# Altium PCB CurrentMeter.PcbDoc
Units mm, origin at the board's own origin, x right, y up, seen from the top; angles counter-clockwise.
Board outline 72.25 x 57.25 mm, 2 copper layers (Top Layer, Bottom Layer); 55 components, 44 nets, 208 pads, 23 vias.
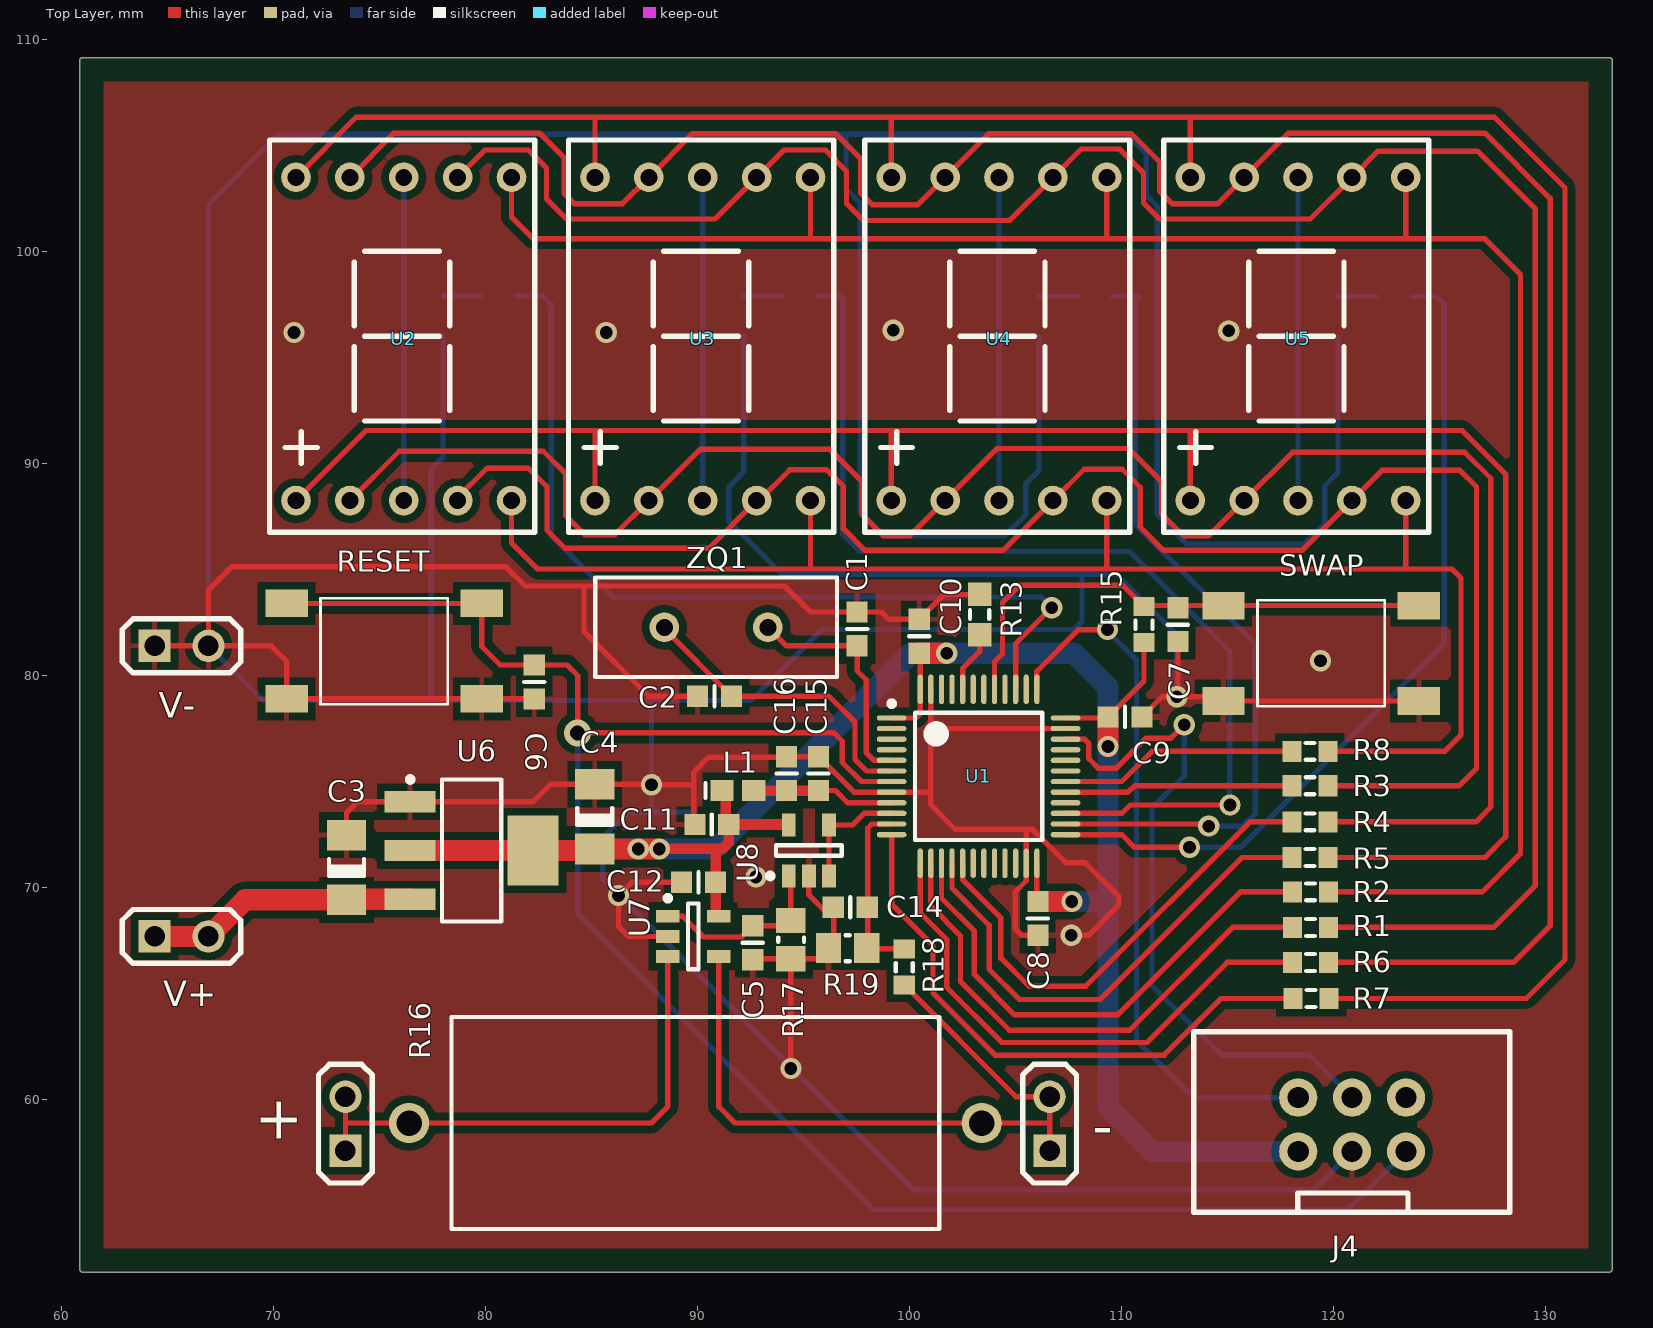
[diagram p0: Top Layer view]
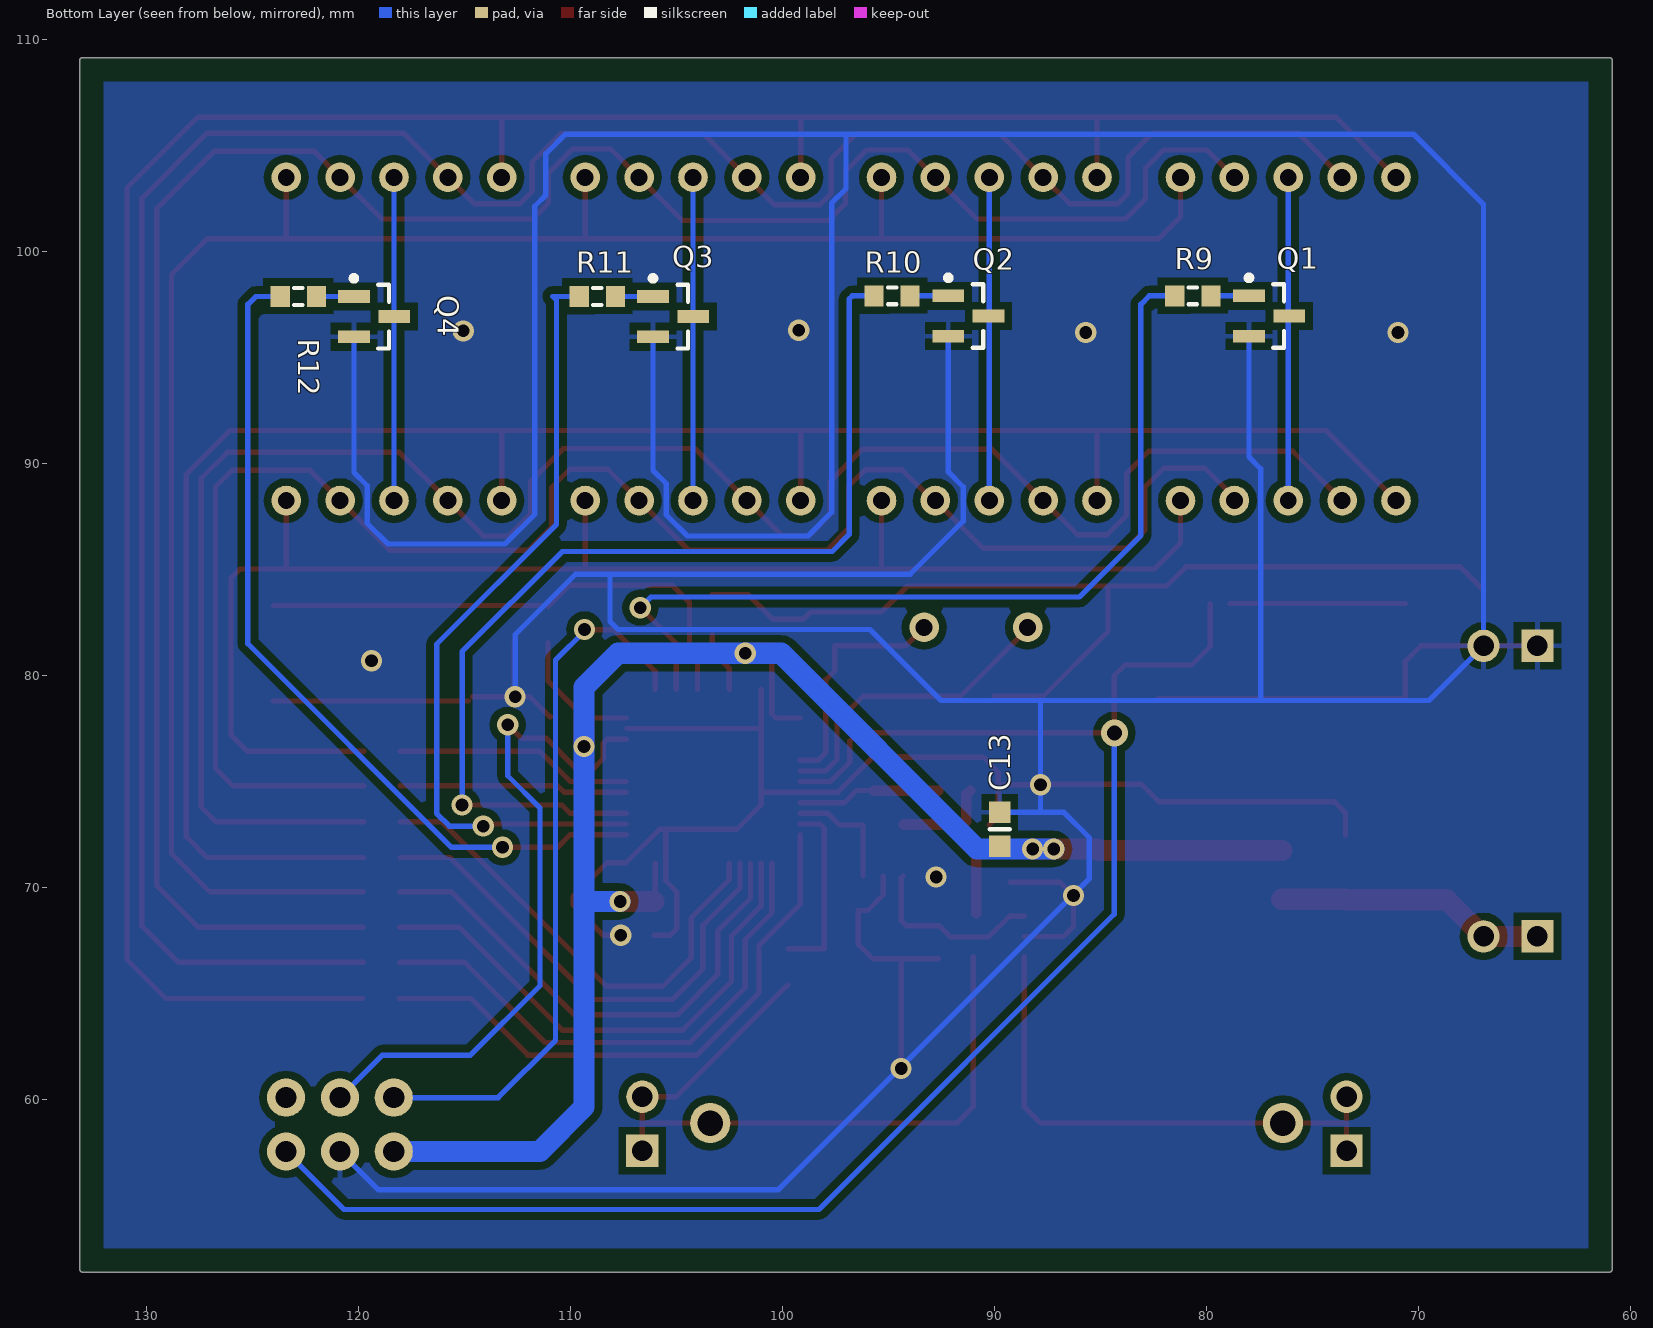
[diagram p1: Bottom Layer view, seen from below]
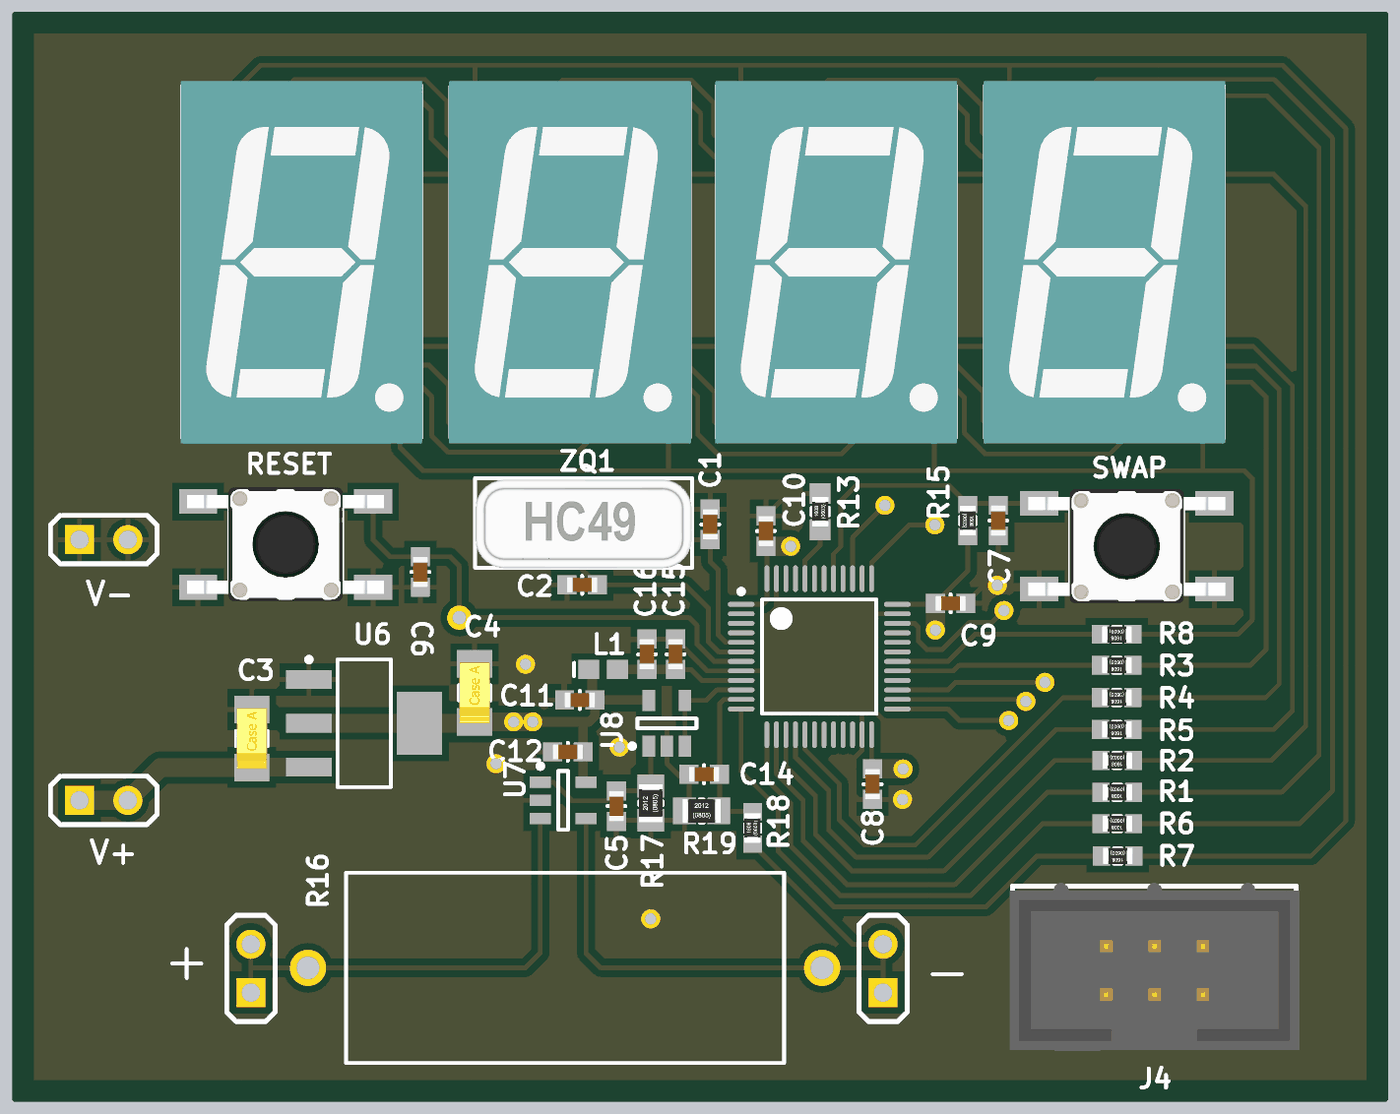
[diagram p2: 3D render of the assembled board from above, using the file's embedded part models]
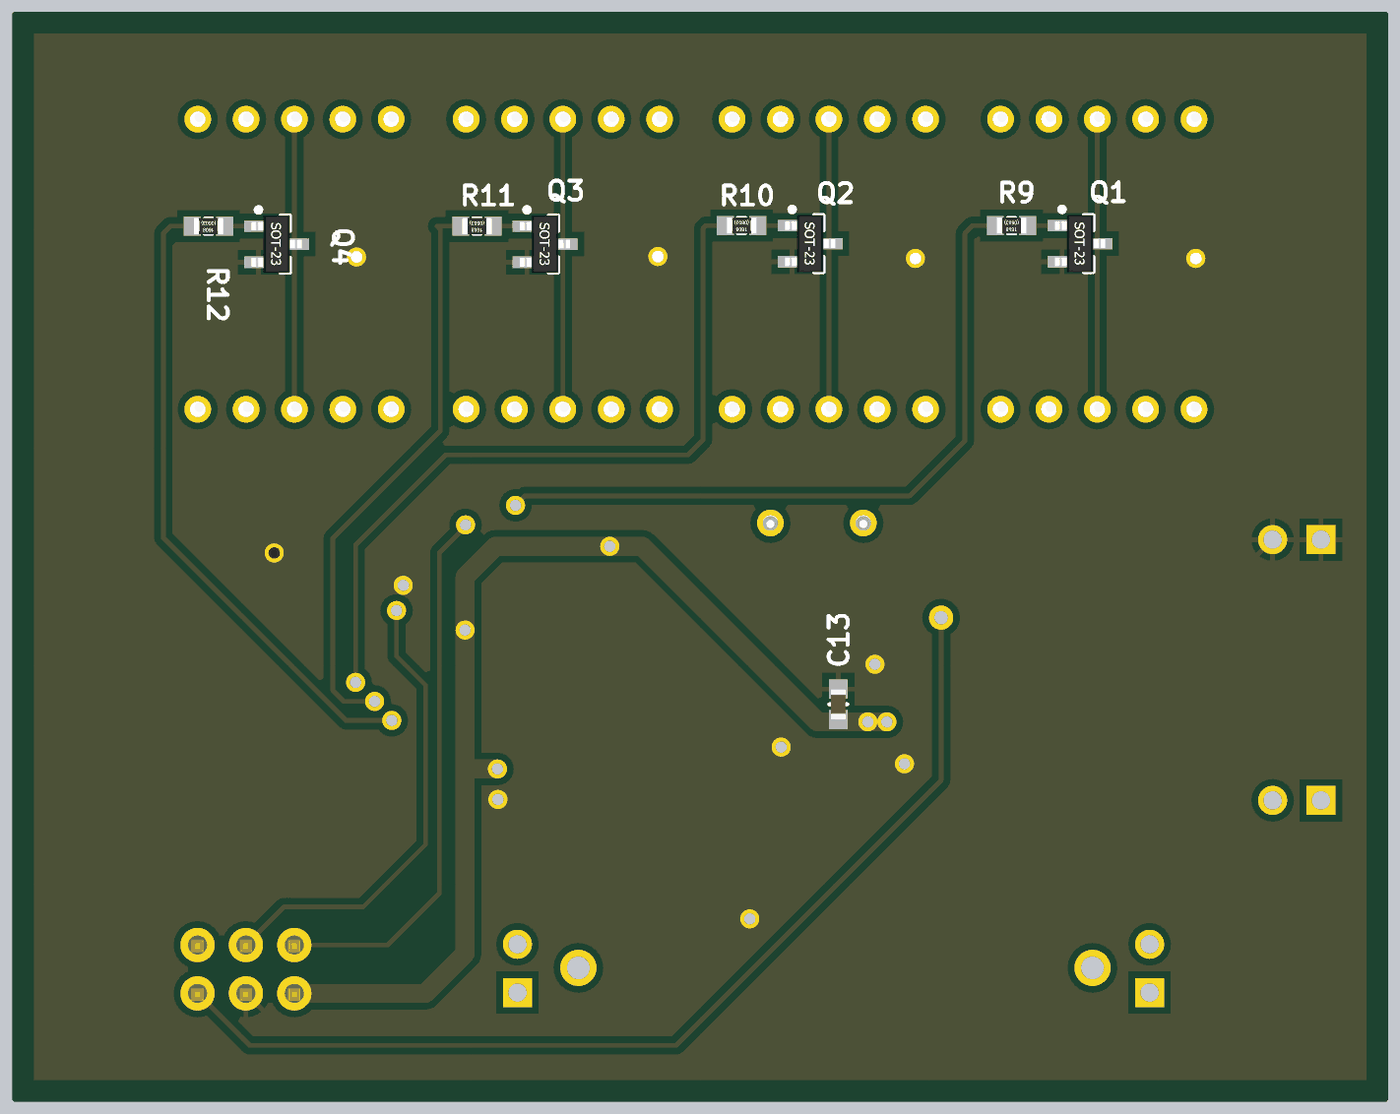
[diagram p3: 3D render of the assembled board from below, using the file's embedded part models]

## Layer stack, top to bottom
Top Solder: solder mask 0.0102, Solder Resist, Dk 3.5
Top Layer: signal copper 0.0356
Dielectric 1: dielectric 0.32, FR-4, Dk 4.8
Bottom Layer: signal copper 0.0356
Bottom Solder: solder mask 0.0102, Solder Resist, Dk 3.5

## Board outline
60.873,52 ccw(c61,52) 61,51.873 133,51.873 ccw(c133,52) 133.127,52 133.127,109 ccw(c133,109) 133,109.127 61,109.127 ccw(c61,109) 60.873,109

## Design rules (kind name [scope] priority, off if disabled: settings)
AssemblyTestPointUsage [All] p1 off:
AssemblyTestpoint [All] p1 off: testpointundercomponent=TRUE minsize=1.016 maxsize=2.54 preferedsize=1.524 minholesize=0 maxholesize=1.016 preferedholesize=0.813 testpointgrid=0.025 usegrid=TRUE gridtolerance=0 allowsidetop=TRUE allowsidebottom=TRUE
Clearance UnplatedPads_Clearance [IsPad and OnLayer('Multi-Layer') and not PadIsPlated] p1: gap=3
Clearance Poly_Clearance [InPolygon] p2: gap=0.35
Clearance Class4_ExtLayers_Clearance [All] p3: gap=0.15
Clearance Class4_IntLayers_Clearance [OnCopper and not (OnLayer('Top Layer') or OnLayer('Bottom Layer'))] p4: gap=0.15
DiffPairsRouting [All] p1: maxlimit=0.15 minlimit=0.15 mostfreqgap=0.15 toplayer_minwidth=0.25 toplayer_maxwidth=0.25 toplayer_prefwidth=0.25 bottomlayer_minwidth=0.25 bottomlayer_maxwidth=0.25 bottomlayer_prefwidth=0.25 maxuncoupledlength=10
FabricationTestPointUsage [All] p1 off: valid=0 allowmultiple=FALSE
FabricationTestpoint [All] p1 off: side=3 testpointundercomponent=TRUE minsize=1.016 maxsize=2.54 preferedsize=1.524 minholesize=0 maxholesize=1.016 preferedholesize=0.813 testpointgrid=0.025 allowsidetop=TRUE allowsidebottom=TRUE usegrid=TRUE gridtolerance=0
HoleSize HoleSize_UnplatedPads [IsPad and not PadIsPlated] p1: absolutevalues=TRUE maxlimit=999 minlimit=0.5 maxpercent=80.000 minpercent=20.000
HoleSize HoleSize_PlatedPads [IsPad and PadIsPlated] p2: absolutevalues=TRUE maxlimit=999 minlimit=0.3 maxpercent=80.000 minpercent=20.000
MinimumAnnularRing MinimumAnnularRing_Pad [IsPad and PadIsPlated] p1: minimumring=0.25
MinimumAnnularRing MinimumAnnularRing_Via [IsVia] p2: minimumring=0.15
MinimumSolderMaskSliver [All] p1: minsoldermaskwidth=0.15
NetAntennae [All] p1 off: netantennaetolerance=0
PlaneClearance [All] p1: clearance=0.35
PlaneConnect [All] p1: planeconnectstyle=Relief reliefexpansion=0.5 reliefentries=4 reliefconductorwidth=0.25 reliefairgap=0.35
PlaneConnect PlaneConnect_Via_Thermal [IsVia or InPadClass('ThermalPads')] p2: planeconnectstyle=Direct reliefexpansion=0.508 reliefentries=4 reliefconductorwidth=0.254 reliefairgap=0.254
PolygonConnect PolygonConnect_Via [IsVia] p1: connectstyle=Direct reliefconductorwidth=0.254 reliefentries=4 polygonreliefangle="90 Angle" airgapwidth=0.254
PolygonConnect [All] p2: connectstyle=Relief reliefconductorwidth=0.25 reliefentries=4 polygonreliefangle="90 Angle" airgapwidth=0.35
RoutingVias RADIO_RoutingVias [HasFootprint('ANTENNA')] p1: holewidth=0.2 width=1.2 viastyle="Through Hole" minholewidth=0 minwidth=0.5 maxholewidth=1 maxwidth=2
RoutingVias Thermal_RoutingVias [IsVia and InAnyComponent] p2: holewidth=0.2 width=0.5 viastyle="Through Hole" minholewidth=0.2 minwidth=0.5 maxholewidth=0.2 maxwidth=0.5
RoutingVias PWR_RoutingVias [InNetClass('PWR')] p3: holewidth=0.5 width=1 viastyle="Through Hole" minholewidth=0.3 minwidth=0.8 maxholewidth=0.5 maxwidth=1
RoutingVias [All] p4: holewidth=0.3 width=0.8 viastyle="Through Hole" minholewidth=0.3 minwidth=0.8 maxholewidth=2 maxwidth=2
ShortCircuit ShortCircuit_RADIO [HasFootprint('ANTENNA')] p1: allowed=TRUE
ShortCircuit [All] p2: allowed=FALSE
SilkToBoardRegionClearance [All] p1 off:
SilkToSilkClearance [All] p1: silktosilkclearance=0.15
SilkToSolderMaskClearance [IsPad vs IsText] p1: minsilkscreentomaskgap=0.05 clearancetoexposedcopper=TRUE
SolderMaskExpansion SolderMaskExpansion_Vias [IsVia] p1: expansion=-10
SolderMaskExpansion SolderMaskExpansion_Pads [IsPad] p2: expansion=0.05
Width PWR_Width [InNetClass('PWR')] p1: maxlimit=10 minlimit=0.25 preferedwidth=0.508
Width Class4_Width_ExtLayers [OnTopLayer or onBottomlayer] p2: maxlimit=10 minlimit=0.15 preferedwidth=0.15
Width Class4_Width_IntLayers [OnCopper and not (OnTopLayer or onBottomLayer)] p3: maxlimit=10 minlimit=0.15 preferedwidth=0.15
15 further rules are at their usual default settings.

## Components (designator, comment, footprint, x,y, rotation, side; value= is the part's Value field where it differs from the comment)
+ "PLS-2-2.54" PLS-2-2.54 73.4,57.6 r180 top (schematic designator J1)
- "PLS-2-2.54" PLS-2-2.54 106.6,57.6 r180 top (schematic designator J2)
C1 "CAPC_0603" CAPC1608-0603N#1 97.525,82.2 r90 top
C2 "CAPC_0603" CAPC1608-0603N#1 90.8,79.025 r180 top
C3 "TCAPC_A" TCAPC_A 73.45,70.95 r90 top
C4 "TCAPC_A" TCAPC_A 85.15,73.35 r90 top
C5 "CAPC_0603" CAPC1608-0603N#2 92.6,67.4 r90 top
C6 "CAPC_0603" CAPC1608-0603N#2 82.3,79.7 r90 top
C7 "CAPC_0603" CAPC1608-0603N#2 112.65,82.4 r90 top
C8 "CAPC_0603" CAPC1608-0603N#2 106.05,68.55 r90 top
C9 "CAPC_0603" CAPC1608-0603N#2 110.15,78.05 r180 top
C10 "CAPC_0603" CAPC1608-0603N#2 100.45,81.85 r270 top
C11 "CAPC_0603" CAPC1608-0603N#2 90.675,72.975 r0 top
C12 "CAPC_0603" CAPC1608-0603N#2 90.05,70.25 r0 top
C13 "CAPC_0603" CAPC1608-0603N#2 89.75,72.75 r270 bottom
C14 "CAPC_0603" CAPC1608-0603N#1 97.2,69.075 r180 top
C15 "CAPC_0603" CAPC1608-0603N#2 95.7,75.375 r270 top
C16 "CAPC_0603" CAPC1608-0603N#2 94.2,75.375 r270 top
J4 "IDC6-2.54" IDC6-2.54 123.4,60.1 r0 top
L1 "INDC-0603" INDC1608AN 91.9,74.575 r0 top
Q1 "BC817" SOT23-3N 77.05,96.95 r180 bottom
Q2 "BC817" SOT23-3N 91.225,96.95 r180 bottom
Q3 "BC817" SOT23-3N 105.15,96.925 r180 bottom
Q4 "BC817" SOT23-3N 119.25,96.925 r180 bottom
R1 "RESC_0603" RESC1608-0603N#1 118.9,68.125 r180 top
R2 "RESC_0603" RESC1608-0603N#1 118.9,69.8 r180 top
R3 "RESC_0603" RESC1608-0603N#1 118.875,74.8 r180 top
R4 "RESC_0603" RESC1608-0603N#1 118.875,73.1 r180 top
R5 "RESC_0603" RESC1608-0603N#1 118.875,71.425 r180 top
R6 "RESC_0603" RESC1608-0603N#1 118.9,66.475 r180 top
R7 "RESC_0603" RESC1608-0603N#1 118.925,64.775 r180 top
R8 "RESC_0603" RESC1608-0603N#1 118.875,76.425 r180 top
R9 "RESC_0603" RESC1608-0603N#1 80.65,97.9 r0 bottom
R10 "RESC_0603" RESC1608-0603N#1 94.825,97.9 r0 bottom
R11 "RESC_0603" RESC1608-0603N#1 108.725,97.875 r0 bottom
R12 "RESC_0603" RESC1608-0603N#1 122.825,97.875 r0 bottom
R13 "RESC_0603" RESC1608-0603M 103.3,82.875 r270 top
R15 "RESC_0603" RESC1608-0603N#1 111.05,82.4 r270 top
R16 "RES_5W" RES5W 103.4,58.9 r180 top
R17 "RESC_0805" RESC2012-0805N#1 94.4,67.55 r90 top
R18 "RESC_0603" RESC1608-0603N#2 99.75,66.25 r270 top
R19 "RESC_0805" RESC2012-0805N#2 97.075,67.15 r180 top
RESET "SWT-34" SWT-34 75.225,81.15 r0 top (schematic designator B1)
SWAP "SWT-34" SWT-34 119.4,81.05 r0 top (schematic designator B2)
U1 "STM32F103C8T6" QFP48_L 103.25,75.25 r0 top
U2 "BL-S56A-12" BL-S56A-12 71.068,88.249 r0 top
U3 "BL-S56A-12" BL-S56A-12 85.165,88.249 r0 top
U4 "BL-S56A-12" BL-S56A-12 99.135,88.249 r0 top
U5 "BL-S56A-12" BL-S56A-12 113.232,88.249 r0 top
U6 "LM1117MP-3.3" MP04A_N 79.35,71.75 r0 top
U7 "INA169" INA169_N 89.8,67.7 r0 top
U8 "LM321MF" MF05A_N 95.25,71.75 r90 top
V+ "PLS-2-2.54" PLS-2-2.54 64.4,67.7 r90 top (schematic designator J3)
V- "PLS-2-2.54" PLS-2-2.54 64.4,81.4 r90 top (schematic designator J5)
ZQ1 "Quartz HC49S" HC-49S 90.875,82.275 r0 top

## Footprints (in the part's own frame and the unit in brackets; to place one, negate y for a bottom-side part, rotate by r counter-clockwise, add the part's x,y. Pads: shape width x height; smd on the part's side, far side on the other; paste and mask are expansions set on the pad)
BL-S56A-12 [mm] "LED Numeric Display, 1 Digit"
  round 1.4 hole 0.8: 1(0,0) 2(2.54,0) 3(5.08,0) 4(7.62,0) 5(10.16,0) 6(10.16,15.24) 7(7.62,15.24) 8(5.08,15.24) 9(2.54,15.24) 10(0,15.24)
  silkscreen extent -1.25,-1.5 11.25,17, body extent -1.35,-1.8 11.35,17.25, height 8.03
CAPC1608-0603N#1 [mm] "Chip Capacitor, Body 1.6x0.8mm, IPC Medium Density"
  rect 1x1 smd: 1(0.8,0) 2(-0.8,0)
  silkscreen extent 0,-0.48 0,0.48, body extent -0.8,-0.4 0.8,0.4, height 0.6
CAPC1608-0603N#2 [mm] "Chip Capacitor, Body 1.6x0.8mm, IPC Medium Density"
  rect 1x1 smd: 1(-0.8,0) 2(0.8,0)
  silkscreen extent 0,-0.48 0,0.48, body extent -0.8,-0.4 0.8,0.4, height 0.6
HC-49S [mm] "Quartz Crystal, Thru-Hole; 2 Leads; Body 11.35 x 4.65 x 13.46 mm (LxWxH max)"
  round 1.4 hole 0.8: 1(-2.44,0) 2(2.44,0)
  silkscreen extent -5.7,-2.35 5.7,2.35, body extent -5.67,-2.37 5.68,2.28, height 3.6
IDC6-2.54 [mm]
  round 1.8 hole 1: 1(-5.08,-2.54) 2(-5.08,0) 3(-2.54,-2.54) 4(-2.54,0) 5(0,-2.54) 6(0,0)
  silkscreen extent -10,-5.4 4.9,3.1, body extent -10.15,-5.58 5.07,3.27, height 9.13
INA169_N [mm] "SOT23, 5-Leads, Body 2.90x2.80mm, Pitch 0.95mm, IPC Medium Density"
  rect 1.1x0.6 smd: 1(-1.2,0.95) 2(-1.2,0) 3(-1.2,-0.95) 4(1.2,-0.95) 5(1.2,0.95)
  silkscreen extent -1.32,-1.55 0.25,1.92, body extent -0.87,-1.52 0.87,1.53, height 1.45
INDC1608AN [mm] "Chip Inductor, Body 1.6x0.8mm, IPC Medium Density"
  rect 1.1x1 smd: 1(-0.75,0) 2(0.75,0)
  silkscreen extent -1.53,-0.35 -1.53,0.35, body extent -0.9,-0.5 0.9,0.5, height 1
MF05A_N [mm] "SOT23, 5-Leads, Body 2.9x1.6mm, Pitch 0.95mm, Lead Span 2.8mm, IPC Medium Density"
  rect 1.1x0.65 smd: 1(-1.2,0.95) 2(-1.2,0) 3(-1.2,-0.95) 4(1.2,-0.95) 5(1.2,0.95)
  silkscreen extent -1.32,-1.55 0.25,1.95, body extent -0.9,-1.55 0.9,1.55, height 1.22
MP04A_N [mm] "SOT223, 4-Leads, Body 6.5x3.5mm, Pitch 2.3mm, Lead Span 7mm, IPC Medium Density"
  rect 2.4x1 smd: 1(-2.9,2.3) 2(-2.9,0) 3(-2.9,-2.3)
  rect 2.4x3.3 smd: 4(2.9,0)
  silkscreen extent -3.02,-3.35 1.4,3.47, body extent -1.85,-3.35 1.85,3.35, height 1.8
PLS-2-2.54 [mil] "Classic 100 mil header plastic case"
  rect 60x60 hole 38: 1(0,0)
  round 60 hole 38: 2(0,-100)
  silkscreen extent -50,-160 50,60, body extent -50,-160 50,60, height 300
QFP48_L [mm] "TSQFP, 48-Leads, Body 7.00x7.00mm, Pitch 0.50mm, IPC High Density"
  oval 1.4x0.25 smd: 1(-4.1,2.75) 2(-4.1,2.25) 3(-4.1,1.75) 4(-4.1,1.25) 5(-4.1,0.75) 6(-4.1,0.25) 7(-4.1,-0.25) 8(-4.1,-0.75) 9(-4.1,-1.25) 10(-4.1,-1.75) 11(-4.1,-2.25) 12(-4.1,-2.75) 25(4.1,-2.75) 26(4.1,-2.25) 27(4.1,-1.75) 28(4.1,-1.25) 29(4.1,-0.75) 30(4.1,-0.25) 31(4.1,0.25) 32(4.1,0.75) 33(4.1,1.25) 34(4.1,1.75) 35(4.1,2.25) 36(4.1,2.75)
  oval 0.25x1.4 smd: 13(-2.75,-4.1) 14(-2.25,-4.1) 15(-1.75,-4.1) 16(-1.25,-4.1) 17(-0.75,-4.1) 18(-0.25,-4.1) 19(0.25,-4.1) 20(0.75,-4.1) 21(1.25,-4.1) 22(1.75,-4.1) 23(2.25,-4.1) 24(2.75,-4.1) 37(2.75,4.1) 38(2.25,4.1) 39(1.75,4.1) 40(1.25,4.1) 41(0.75,4.1) 42(0.25,4.1) 43(-0.25,4.1) 44(-0.75,4.1) 45(-1.25,4.1) 46(-1.75,4.1) 47(-2.25,4.1) 48(-2.75,4.1)
  silkscreen extent -4.22,-3 3,3.55, body extent -3.5,-3.5 3.5,3.5, height 1.6
RES5W [mm] "5W resistor"
  round 1.9 hole 1.2: 1(0,0) 2(27,0)
  silkscreen extent 2,-5 25,5, body extent -0.25,-5 27.25,5, height 10
RESC1608-0603M [mm] "Chip Resistor, Body 1.6x0.8mm, IPC Low Density"
  rect 1.1x1.1 smd: 1(0.95,0) 2(-0.95,0)
  silkscreen extent -0.2,-0.45 0.2,0.45, body extent -0.78,-0.43 0.77,0.42, height 0.45
RESC1608-0603N#1 [mm] "Chip Resistor, Body 1.6x0.8mm, IPC Medium Density"
  rect 0.9x1 smd: 1(-0.85,0) 2(0.85,0)
  silkscreen extent -0.2,-0.4 0.2,0.4, body extent -0.77,-0.42 0.78,0.43, height 0.45
RESC1608-0603N#2 [mm] "Chip Resistor, Body 1.6x0.8mm, IPC Medium Density"
  rect 0.9x1 smd: 1(0.85,0) 2(-0.85,0)
  silkscreen extent -0.2,-0.4 0.2,0.4, body extent -0.78,-0.43 0.77,0.42, height 0.45
RESC2012-0805N#1 [mm] "Chip Resistor, Body 2.0x1.3mm, IPC Medium Density"
  rect 1.2x1.4 smd: 1(-0.9,0) 2(0.9,0)
  silkscreen extent -0.1,-0.63 0.1,0.6, body extent -1,-0.62 1,0.63, height 0.45
RESC2012-0805N#2 [mm] "Chip Resistor, Body 2.0x1.3mm, IPC Medium Density"
  rect 1.2x1.4 smd: 1(0.9,0) 2(-0.9,0)
  silkscreen extent -0.1,-0.6 0.1,0.63, body extent -1,-0.63 1,0.62, height 0.45
SOT23-3N [mm] "SOT23, 3-Leads, Body 2.9x1.3mm, Pitch 0.95mm, Lead Span 2.5mm, IPC Medium Density"
  rect 1.5x0.6 smd: 1(-0.95,0.95) 2(-0.95,-0.95) 3(0.95,0)
  silkscreen extent -1.07,-1.5 0.7,1.92, body extent -1.32,-1.5 1.32,1.5, height 1.08
SWT-34 [mm] "SMD Button, KLS7-TS6604-7.0-180-T"
  rect 2x1.3 smd: 1(-4.6,-2.25) 2(4.6,-2.25) 3(-4.6,2.25) 4(4.6,2.25)
  silkscreen extent -3,-2.5 3,2.5, body extent -5.18,-3 5.18,3, height 7
TCAPC_A [mm] "Tantalum type A capacitor"
  rect 1.45x1.85 smd: 1(-1.525,0) 2(1.525,0)
  silkscreen extent -0.4,-0.82 0.4,0.83, body extent -1.6,-0.8 1.6,0.8, height 1.6

## Part data
C1 C2 C5 C6 C7 C8 C9 C10 C11 C12 C13 C14 C15 C16: "Capacitor 0603"
C3 C4: "Capacitor tantalum SMD type A"
J4: "IDC6 2.54 mm pitch Straight, plastic Box"
L1: "Chip Inductor, Body Body 1.6x0.8mm"
Q1 Q2 Q3 Q4: "BC817 NPN Transistor"
R1 R2 R3 R4 R5 R6 R7 R8 R9 R10 R11 R12 R13 R15 R18: "Resistor 0603"
R16: "Resistor 5W"
R17 R19: "Resistor 0805"
RESET SWAP: "KLS7-TS6604-7.0-180-T, SMD Button h=7mm"
U1: "ARM 32-bit MCU with Flash, USB, CAN, seven 16-bit timers, two ADCs and nine communication interfaces"
U2 U3 U4 U5: "LED Numeric Display, 1 Digit"
U6: "800mA Low-Dropout Linear Regulator"
U7: "High-side Current Shunt Monitor"
U8: "Low Power Single Op Amp"

## Via types
v1: diameter 1, hole 0.6, Top Layer to Bottom Layer, 22 vias
v2: diameter 1.27, hole 0.711, Top Layer to Bottom Layer, 1 vias

## Nets (pads, with @x,y where several pads share a name; then routed paths per layer and width w, separated by ;. In a path a pad name is that pad's centre, name@x,y a point inside that pad or via, vN(x,y) a via of type N, cw(c..) or ccw(c..) an arc to the next point about the centre after c; other vN are vias at no path point)
3V3: C4.1 C8.2 C9.2 C10.2 C11.2 C12.2 C13.2 J4.1 L1.1 R15.2 U1.1 U1.24 U1.36 U1.48 U6.2 U6.4 U7.5 U8.5 | length 98
  Top Layer w0.25: U1.1 100.3,78 100.5,78.2 U1.48 100.5,81 C10.2 ; U1.24 106,69.4 C8.2 ; U1.36 C9.2@109.3,78 ; C9.2 111.05,79.75 R15.2
  Top Layer w0.5: v1(88.2,71.825) 91.175,71.825 91.475,72.125 C11.2 ; U7.5@90.85,68.8 C12.2 90.85,71.775 ; L1.1 91.325,74.4 91.325,73.125 C11.2 ; U8.5@94.275,72.975 C11.2
  Top Layer w1: U6.2 U6.4 85.075,71.75 C4.1 v1(87.2,71.825) v1(88.2,71.825) ; C10.2@100.5,81.05 v1(101.75,81.05) ; C8.2 v1(107.65,69.35) ; v1(109.35,76.65) C9.2
  Bottom Layer w1: v1(87.2,71.825) v1(88.2,71.825) 90.825,71.825 100.05,81.05 v1(101.75,81.05) 107.75,81.05 109.35,79.45 v1(109.35,76.65) 109.35,59.65 111.44,57.56 J4.1 ; v1(107.65,69.35) 109.3,69.35
7LED_SWAP: C7.2 R15.1 SWAP.3 SWAP.4 U1.41 | length 24.6
  Top Layer w0.25: U1.41 104,80.65 104.375,81.025 104.375,83.45 105.175,84.25 110.05,84.25 R15.1 ; R15.1@111.1,83.3 SWAP.3 SWAP.4
15V: C3.1 U6.3 V+.1 V+.2 | length 12.8
  Top Layer w0.5: U6.3@76.425,69.425 U6.3
  Top Layer w1: V+.1 V+.2 68.665,69.425 C3.1 73.475,69.45 U6.3
A: R1.2 U1.14 | length 24.8
  Top Layer w0.25: U1.14 101,69.125 102.4,67.725 102.4,65.575 104.7,63.275 110.375,63.275 115.225,68.125 R1.2
B: R2.2 U1.15 | length 24.1
  Top Layer w0.25: U1.15 101.5,69.5 103.05,67.95 103.05,65.9 104.95,64 109.8,64 115.6,69.8 R2.2
C: R3.2 U1.29 | length 10.8
  Top Layer w0.25: U1.29 110.3,74.5 110.6,74.8 R3.2
CATH1: R9.2 U1.39 | length 42.2
  Top Layer w0.25: U1.39 105,81.5 v1(106.7,83.2)
  Bottom Layer w0.25: R9.2 82.7,97.9 83.1,97.5 83.1,86.6 86,83.7 106.2,83.7 v1(106.7,83.2)
CATH2: R10.2 U1.27 | length 48
  Top Layer w0.25: U1.27 110,73.5 110.4,73.9 v1(115.1,73.9)
  Bottom Layer w0.25: R10.2 96.7,97.9 96.85,97.75 96.85,86.65 97.65,85.85 110.375,85.85 115.1,81.125 v1(115.1,73.9)
CATH3: R11.2 U1.26 | length 37.3
  Top Layer w0.25: U1.26 114,73 v1(114.1,72.9)
  Bottom Layer w0.25: R11.2 110.825,97.875 110.65,97.7 110.65,87.125 116.3,81.475 116.3,73.5 115.7,72.9 v1(114.1,72.9)
CATH4: R12.2 U1.25 | length 39.8
  Top Layer w0.25: U1.25 110,72.5 110.6,71.9 v1(113.2,71.9)
  Bottom Layer w0.25: v1(113.2,71.9) 115.6,71.9 125.2,81.5 125.2,97.5 124.825,97.875 R12.2
D: R4.2 U1.17 | length 22.7
  Top Layer w0.25: U1.17 102.5,70.375 104.3,68.575 104.3,66.675 105.625,65.35 108.3,65.35 116.05,73.1 R4.2
DP: R8.2 U1.30 | length 11.3
  Top Layer w0.25: U1.30 110,75 111.425,76.425 R8.2
E: R5.2 U1.16 | length 23.4
  Top Layer w0.25: U1.16 102,69.975 103.75,68.225 103.75,66.15 105.175,64.725 108.975,64.725 115.675,71.425 R5.2
F: R6.2 U1.13 | length 25.3
  Top Layer w0.25: U1.13 100.5,68.8 101.75,67.55 101.75,65.3 104.35,62.7 111.2,62.7 114.975,66.475 R6.2
G: R7.2 U1.12 | length 27.6
  Top Layer w0.25: U1.12 99.15,69.225 101.1,67.275 101.1,65.025 104.025,62.1 112,62.1 114.675,64.775 R7.2
GND: C1.1 C2.1 C3.2 C4.2 C5.1 C6.1 C7.1 C8.1 C9.1 C10.1 C11.1 C12.1 C13.1 C14.1 C15.1 C16.1 J4.3 Q1.2 Q2.2 Q3.2 Q4.2 R13.2 R17.1 R19.1 RESET.1 RESET.2 SWAP.1 SWAP.2 U1.8 U1.23 U1.35 U1.47 U6.1 U7.2 U8.2 V-.1 V-.2 | length 461.2
  Top Layer w0.25: V-.1 V-.2 ; C3.2 73.45,73.525 73.975,74.05 U6.1 82.25,74.05 83.075,74.875 C4.2 v1@87.825,74.875 ; C6.1 RESET.2 RESET.1 70.625,80.675 69.9,81.4 V-.2 ; v1(87.825,74.85) 89.825,74.85 ; U7.2 86.75,67.7 86.275,68.175 v1(86.275,69.625) 86.9,70.25 C12.1 ; C2.1@90.025,79.025 87.7,79.025 84.65,82.075 84.65,84.225 ; C11.1@90.25,72.95 89.825,73.375 89.825,75.45 90.525,76.15 C16.1@94.6,76.15 ; C5.1@92.65,66.65 R17.1 ; C16.1 C15.1 97.375,74.5 U1.8 100.975,74.5 ; v1(94.4,61.475) R17.1 ; U8.2 95.25,69.65 95.975,68.925 96.425,68.925 96.425,67.325 96.225,67.125 95.75,66.65 R17.1 ; U1.47 101,77.55 ; R13.2 101.625,83.825 C10.1 99.025,82.65 98.675,83 C1.1 95.325,83 94.1,84.225 84.65,84.225 ; C8.1 105.3,67.75 104.975,68.075 104.975,69.8 105.5,70.325 U1.23 105.5,72.75 ; U1.35 101.05,77.5 101,77.55 ; v1(107.625,67.75) 108.425,67.75 109.875,69.2 109.875,69.575 108.275,71.175 107.375,71.175 105.8,72.75 105.5,72.75 ; C9.1 111.9,79 v1(112.6,79) ; C7.1 112.65,79.05 v1(112.6,79) ; SWAP.1@114.6,79 v1(112.6,79) ; SWAP.1 SWAP.2 ; V-.2 66.94,84.04 68.025,85.125 80.975,85.125 81.875,84.225 84.65,84.225 ; 101,77.55 101,73.9 102.15,72.75 105.5,72.75
  Bottom Layer w0.25: Q1.2 78,90.3 77.45,89.75 77.45,78.825 ; C13.1 87.825,73.55 ; Q2.2 92.175,89.6 91.475,88.9 91.475,87.275 93.975,84.775 108.125,84.775 ; Q3.2 106.1,89.675 105.475,89.05 105.475,87.575 104.475,86.575 98.8,86.575 97.675,87.7 97.675,102.275 97,102.95 97,105.525 ; v1(112.6,79) 112.6,81.925 109.75,84.775 108.125,84.775 ; Q4.2 120.2,89.575 119.575,88.95 119.575,87.175 118.6,86.2 113.075,86.2 111.675,87.6 111.675,102.125 111.15,102.65 111.15,104.6 110.225,105.525 97,105.525 ; J4.3 119.05,55.75 100.2,55.75 85.525,70.425 85.525,72.35 86.725,73.55 87.825,73.55 ; 77.45,78.825 69.515,78.825 V-.2 66.94,102.215 70.25,105.525 97,105.525 ; 77.45,78.825 87.825,78.825 ; 87.825,73.55 v1(87.825,74.85) 87.825,78.825 ; 87.825,78.825 92.525,78.825 95.875,82.175 107.75,82.175 108.125,82.55 108.125,84.775
  other v1: 92.75,70.5 119.375,80.7 70.975,96.175 85.7,96.175 115.05,96.25 99.225,96.275
IMEAS: U1.10 U8.3 U8.4 | length 5.6
  Top Layer w0.25: U8.3 U8.4 97.3,72.95 97.85,73.5 U1.10
NetC1_2: C1.2 U1.5 ZQ1.2 | length 11.1
  Top Layer w0.25: ZQ1.2 94.19,81.4 C1.2 97.525,80.225 97.95,79.8 97.95,76.375 98.325,76 U1.5
NetC2_2: C2.2 U1.6 ZQ1.1 | length 14.6
  Top Layer w0.25: ZQ1.1 88.435,82.19 C2.2 96.2,79.025 97.425,77.8 97.425,76.05 97.975,75.5 U1.6
NetC5_2: C5.2 R17.2 U7.1 U8.1 | length 8.7
  Top Layer w0.25: U7.1 89.3,68.65 90.275,67.675 92.075,67.675 C5.2 94.15,68.2 R17.2 94.4,70.45 U8.1
NetJ1_1: +.1 +.2 R16.2 U7.3 | length 25.1
  Top Layer w0.25: +.1 +.2 ; 73.475,58.9 R16.2 87.825,58.9 88.6,59.675 U7.3
NetJ2_1: -.1 -.2 R16.1 R18.1 U7.4 | length 34.5
  Top Layer w0.25: U7.4 91,59.675 91.775,58.9 R16.1 106.575,58.9 ; R18.1 105.01,60.14 -.2 -.1
NetQ1_1: Q1.1 R9.1 | length 1.8
  Bottom Layer w0.25: Q1.1 R9.1
NetQ1_3: Q1.3 U2.3 U2.8 | length 15.2
  Bottom Layer w0.25: U2.3 U2.8
NetQ2_1: Q2.1 R10.1 | length 1.8
  Bottom Layer w0.25: Q2.1 R10.1
NetQ2_3: Q2.3 U3.3 U3.8 | length 15.2
  Bottom Layer w0.25: U3.3 U3.8
NetQ3_1: Q3.1 R11.1 | length 1.8
  Bottom Layer w0.25: Q3.1 R11.1
NetQ3_3: Q3.3 U4.3 U4.8 | length 15.2
  Bottom Layer w0.25: U4.3 U4.8
NetQ4_1: Q4.1 R12.1 | length 1.8
  Bottom Layer w0.25: Q4.1 R12.1
NetQ4_3: Q4.3 U5.3 U5.8 | length 15.2
  Bottom Layer w0.25: U5.3 U5.8
NetR1_1: R1.1 U2.7 U3.7 U4.7 U5.7 | length 105.7
  Top Layer w0.25: U2.7 79.974,104.775 82.025,104.775 82.875,103.925 82.875,102.475 83.825,101.525 90.821,101.525 U3.7 94.071,104.775 96.025,104.775 97.025,103.775 97.025,102.25 97.825,101.45 104.716,101.45 U4.7 108.091,104.825 109.9,104.825 111.025,103.7 111.025,102.275 111.775,101.525 118.888,101.525 U5.7 122.088,104.725 126.775,104.725 129.5,102 129.5,70.1 127.525,68.125 R1.1
NetR2_1: R2.1 U2.6 U3.6 U4.6 U5.6 | length 96.4
  Top Layer w0.25: U2.6 81.228,101.622 82.25,100.6 123.392,100.6 ; 95.325,100.625 U3.6 ; 109.295,100.68 U4.6 ; R2.1 127,69.8 128.8,71.6 128.8,98.9 127.1,100.6 123.392,100.6 ; U5.6 123.392,100.6
  Bottom Layer w0.25: U5.6 U5.6@123.392,103.705
NetR3_1: R3.1 U2.4 U3.4 U4.4 U5.4 | length 82.6
  Top Layer w0.25: U2.4 78.688,88.388 80.075,89.775 82.025,89.775 82.9,88.9 82.9,86.85 83.75,86 90.536,86 U3.4 92.899,88.249 94.35,89.7 96.1,89.7 96.875,88.925 96.875,86.925 97.9,85.9 104.406,85.9 U4.4 108.231,89.725 110.025,89.725 110.875,88.875 110.875,87 111.975,85.9 118.503,85.9 U5.4 122.278,89.675 125.95,89.675 126.725,88.9 126.725,75.625 125.9,74.8 R3.1
NetR4_1: R4.1 U2.2 U3.2 U4.2 U5.2 | length 91.7
  Top Layer w0.25: U2.2 75.934,90.575 82.725,90.575 83.775,89.525 83.775,87.55 84.688,86.638 86.093,86.638 U3.2 90.131,90.675 96.225,90.675 97.75,89.15 97.75,87.6 98.775,86.575 100.001,86.575 U4.2 104.126,90.7 110.325,90.7 111.875,89.15 111.875,87.625 112.925,86.575 114.098,86.575 U5.2 118.048,90.525 126.175,90.525 127.4,89.3 127.4,73.8 126.7,73.1 R4.1
NetR5_1: R5.1 U2.1 U3.1 U4.1 U5.1 | length 94.8
  Top Layer w0.25: U2.1 74.369,91.55 126.05,91.55 128.1,89.5 128.1,72.4 127.125,71.425 R5.1 ; U3.1 85.165,91.515 ; U4.1 99.135,91.51 ; U5.1 113.232,91.432
NetR6_1: R6.1 U2.9 U3.9 U4.9 U5.9 | length 115.2
  Top Layer w0.25: U2.9 75.694,105.575 82.55,105.575 83.7,104.425 83.7,102.725 84.175,102.25 86.466,102.25 U3.9 89.766,105.55 96.5,105.55 97.7,104.35 97.7,102.725 98.225,102.2 100.386,102.2 U4.9 103.736,105.55 110.45,105.55 111.8,104.2 111.8,102.825 112.375,102.25 114.533,102.25 U5.9 117.858,105.575 127.125,105.575 130.2,102.5 130.2,68.2 128.475,66.475 R6.1
NetR7_1: R7.1 U2.10 U3.10 U4.10 U5.10 | length 119.2
  Top Layer w0.25: U2.10 73.904,106.325 85.165,106.325 ; U3.10 85.165,106.325 ; U4.10 99.135,106.325 ; U5.10 113.232,106.325 ; R7.1 129.075,64.775 130.9,66.6 130.9,103 127.575,106.325 113.232,106.325 ; 85.165,106.325 99.135,106.325 ; 99.135,106.325 113.232,106.325
NetR8_1: R8.1 U2.5 U3.5 U4.5 U5.5 | length 70.9
  Top Layer w0.25: U2.5 81.228,86.247 82.45,85.025 125.575,85.025 126,84.6 126,77.2 125.225,76.425 R8.1 ; 95.325,85.075 U3.5 ; 109.295,85.08 U4.5 ; 123.392,85.117 U5.5
NetR13_1: R13.1 U1.44 | length 2.9
  Top Layer w0.25: U1.44 102.5,80.325 103.3,81.125 R13.1
RESET: C6.2 J4.5 RESET.3 RESET.4 U1.7 | length 88.9
  Top Layer w0.25: RESET.3 RESET.4@78.9,83.4 ; RESET.4 79.825,81.375 80.7,80.5 C6.2 83.85,80.5 84.35,80 v2(84.35,77.3) 96.425,77.3 96.825,76.9 96.825,75.9 97.725,75 U1.7
  Bottom Layer w0.25: v2(84.35,77.3) 84.35,68.75 98.275,54.825 120.665,54.825 J4.5
SWCLK: J4.2 U1.37 | length 33.6
  Top Layer w0.25: U1.37 106,80.2 107.963,82.163 v1@109.313,82.163
  Bottom Layer w0.25: v1@109.288,82.137 110.7,80.725 110.7,62.8 113.4,60.1 J4.2
  other v1: 109.325,82.175
SWDIO: J4.4 U1.34 | length 32
  Top Layer w0.25: U1.34 108.25,77 108.45,76.8 108.45,76.075 108.9,75.625 109.725,75.625 111.15,77.05 112.325,77.05 v1(112.95,77.675)
  Bottom Layer w0.25: v1(112.95,77.675) 112.95,75.275 111.425,73.75 111.425,65.375 114.7,62.1 118.86,62.1 J4.4
VDDA: C15.2 C16.2 L1.2 U1.9 | length 6.7
  Top Layer w0.25: C15.2 96.5,74.575 97.075,74 U1.9
  Top Layer w0.5: L1.2 C16.2 C15.2
VMEAS: C14.2 R18.2 R19.2 U1.11 | length 8.6
  Top Layer w0.25: U1.11 98.225,73 98.025,72.8 98.025,68.925 98.025,67.125 R18.2@99.725,67.125
pads on no net: J4.6 U1.2 U1.3 U1.4 U1.18 U1.19 U1.20 U1.21 U1.22 U1.28 U1.31 U1.32 U1.33 U1.38 U1.40 U1.42 U1.43 U1.45 U1.46

## Polygon pours and split planes (outlines as drawn)
GND on Bottom Layer "Top Layer-No Net" (solid, remove dead copper, pour order 8): 62,108 62,53 132,53 132,108
GND on Top Layer "Top Layer-No Net" (solid, remove dead copper, pour order 6): 62,108 62,53 132,53 132,108

## Silkscreen, mask and mechanical layers (free items; w line width, h text height)
Mechanical 4:
  lines w1: 61,80 61,66.25 61,52 79,52 95,52 ; 61,82 61,94.75 61,109 95,109 ; 97,52 116,52 ; 97,109 133,109 133,82 ; 115,52 133,52 133,80